# Altium PCB Bottom.PcbDoc
Units mm, origin at the board's own origin, x right, y up, seen from the top; angles counter-clockwise.
Board outline 40 x 40 mm, 2 copper layers (Top Layer, Bottom Layer); 16 components, 72 nets, 73 pads, 24 vias.
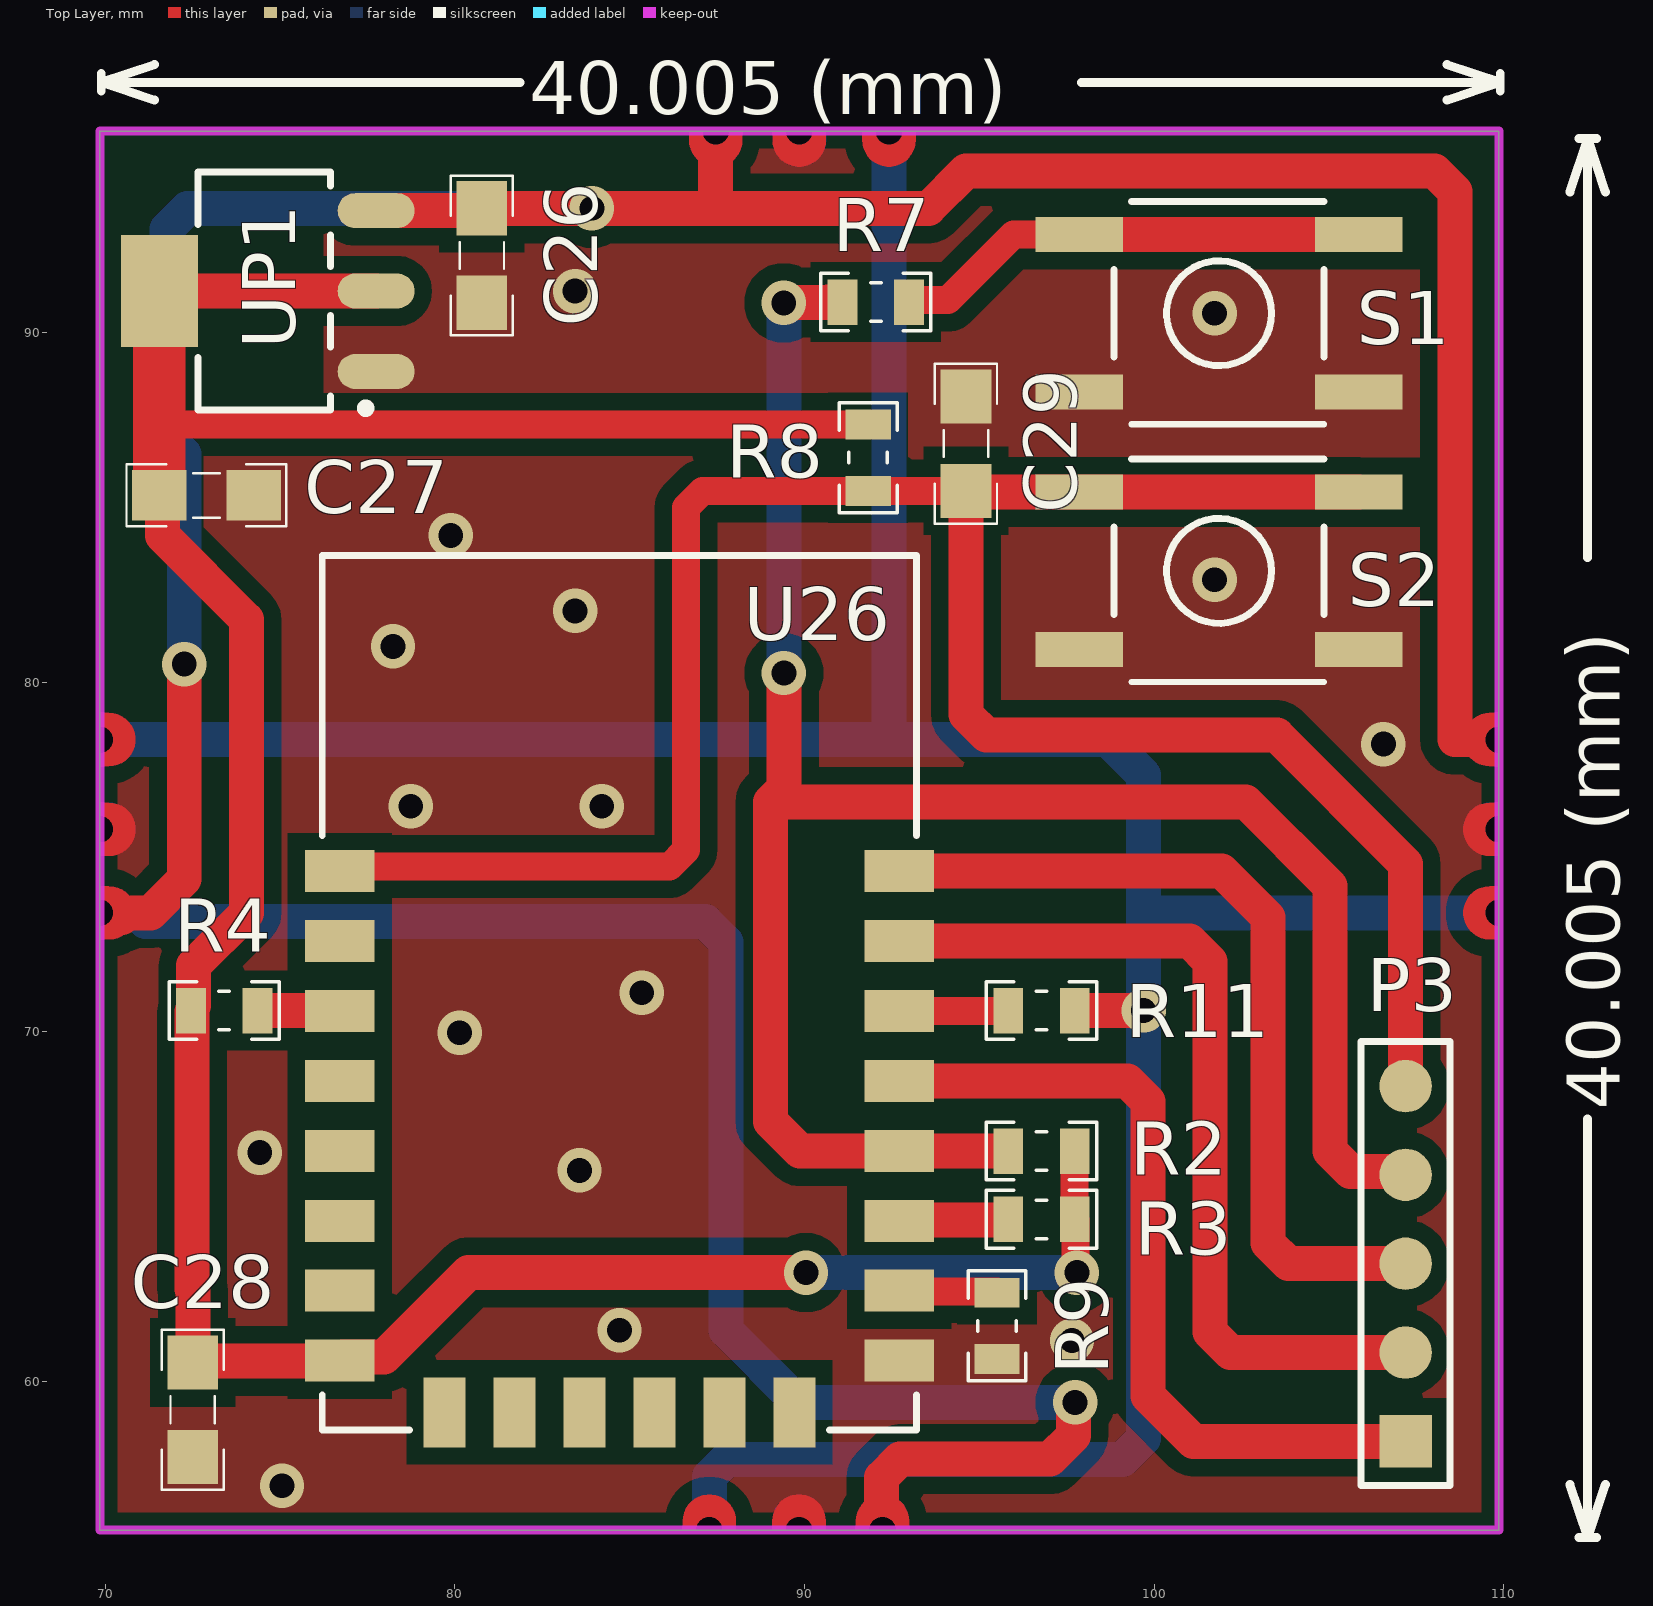
[diagram p0: Top Layer view]
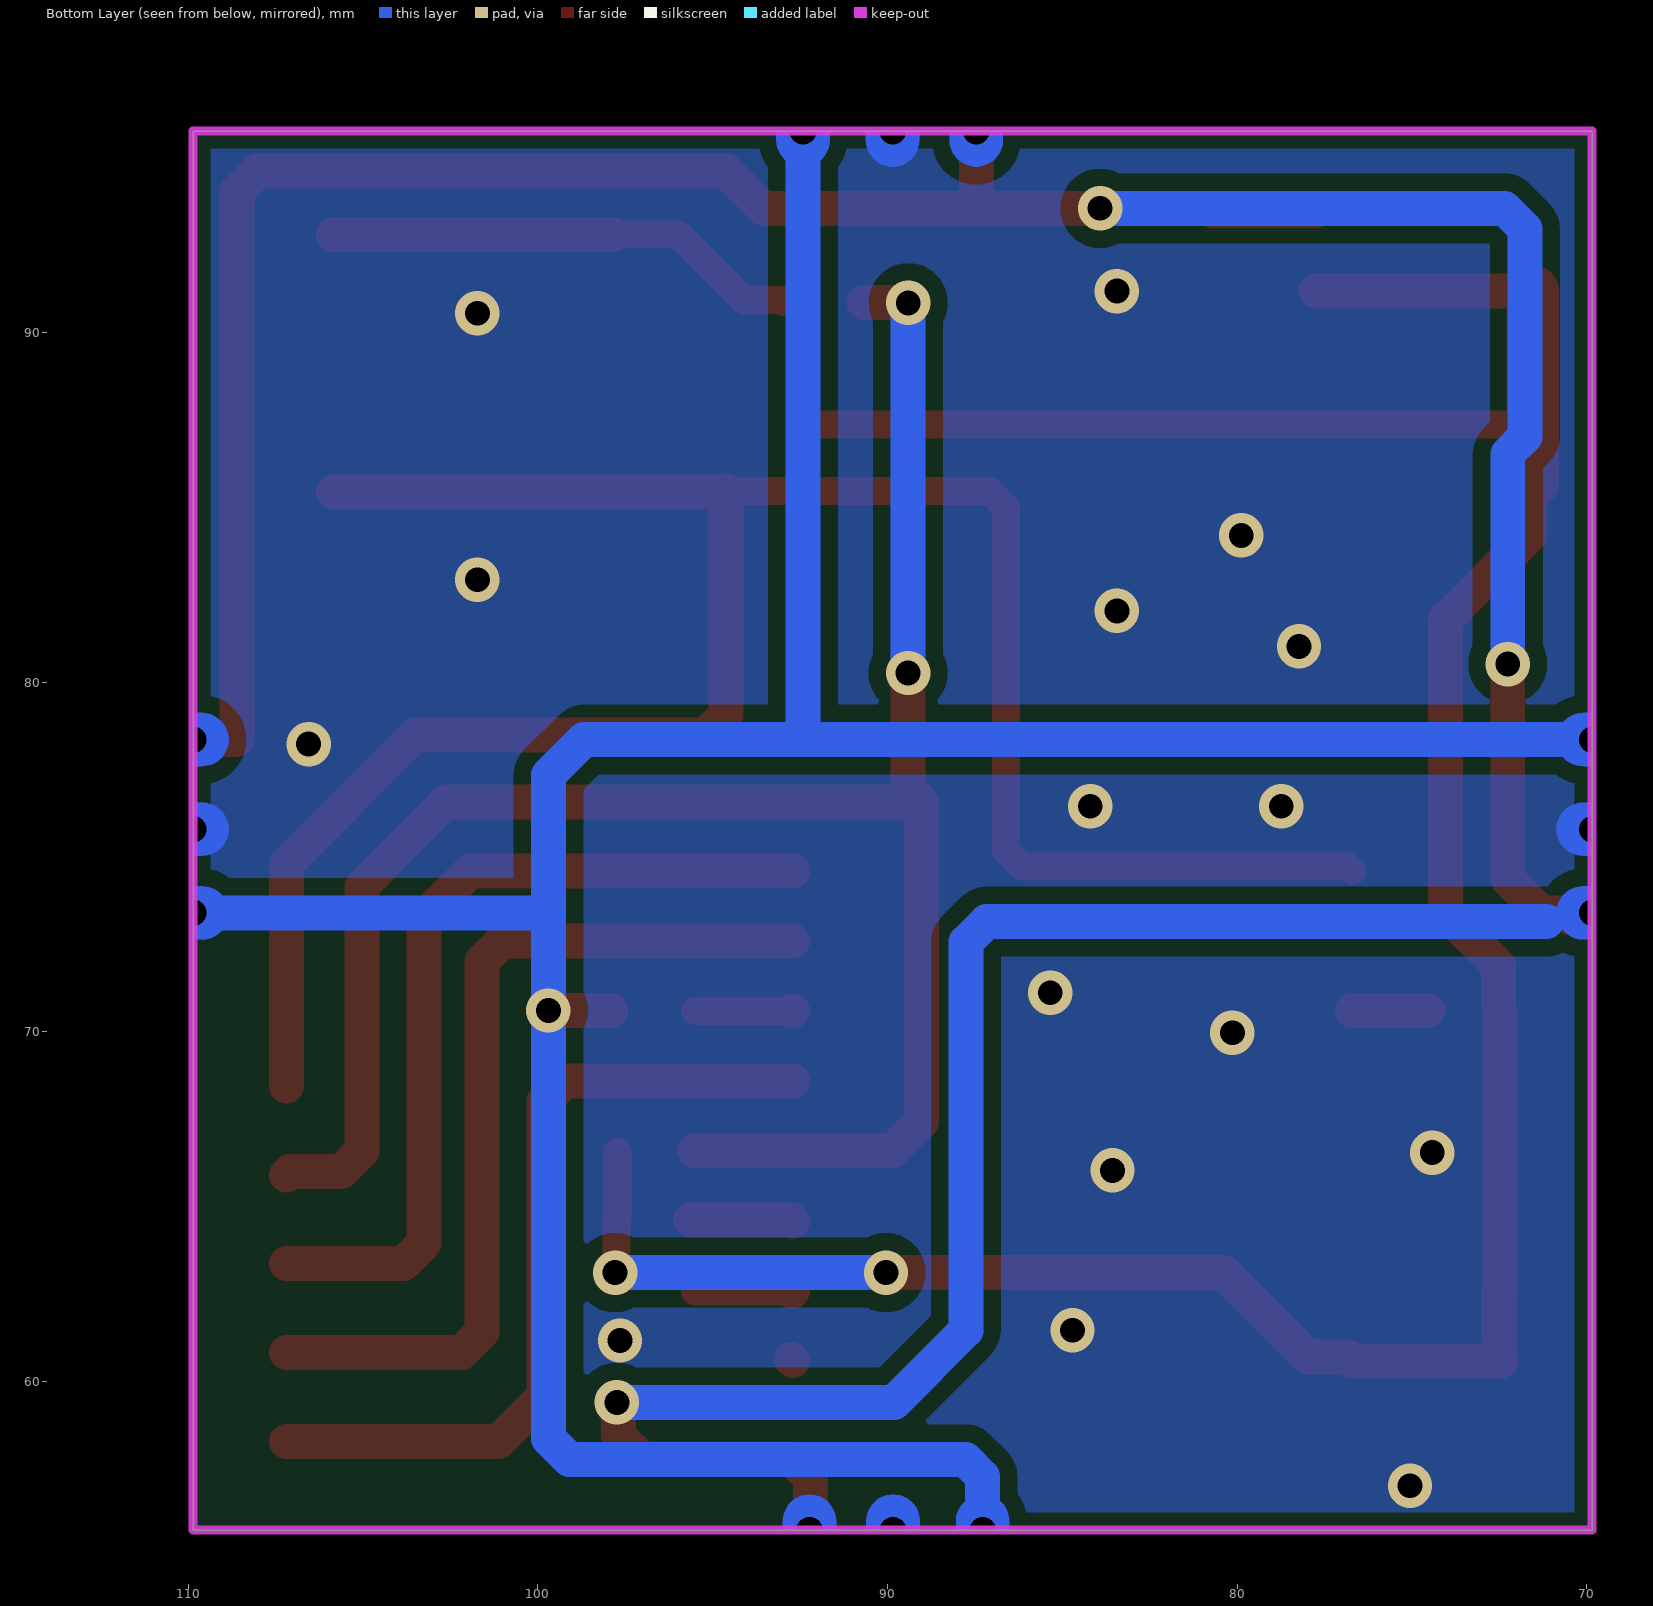
[diagram p1: Bottom Layer view, seen from below]
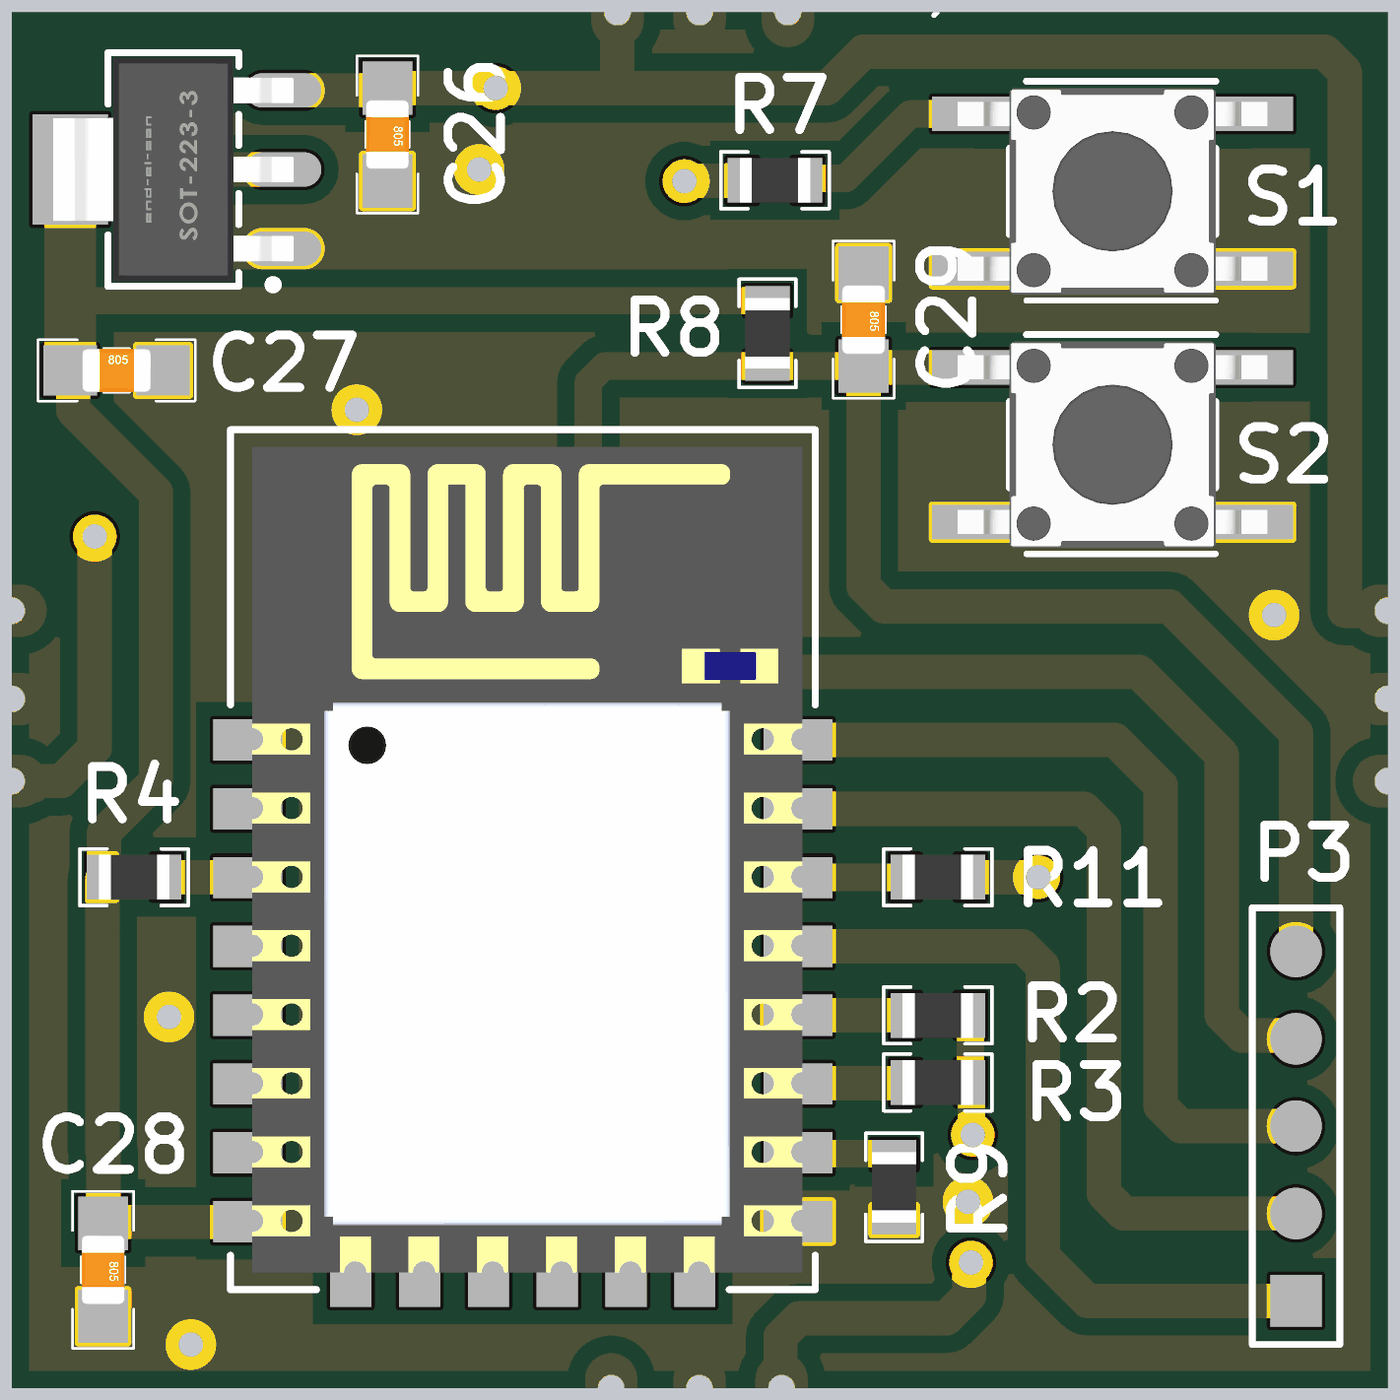
[diagram p2: 3D render of the assembled board from above, using the file's embedded part models]

## Layer stack, top to bottom
Top Solder: solder mask 0.0102, Solder Resist, Dk 3.5
Top Layer: signal copper 0.0356
Dielectric 1: dielectric 0.32, FR-4, Dk 4.8
Bottom Layer: signal copper 0.0356
Bottom Solder: solder mask 0.0102, Solder Resist, Dk 3.5

## Board outline
69.85,55.753 69.85,95.758 109.855,95.758 109.855,55.753

## Design rules (kind name [scope] priority, off if disabled: settings)
Clearance [All] p1: gap=0.5 ignorepadtopadclearanceinfootprint=FALSE
PolygonConnect [All] p1: connectstyle=Direct reliefconductorwidth=0.254 reliefentries=4 polygonreliefangle="90 Angle" airgapwidth=0.254
RoutingVias [All] p1: holewidth=0.711 width=1.27 viastyle="Through Hole" minholewidth=0.711 minwidth=1.27 maxholewidth=0.711 maxwidth=1.27
SolderMaskExpansion [All] p1: expansion=0.102 istentingtop=FALSE
Width [All] p1: maxlimit=2 minlimit=0.254 preferedwidth=1
30 further rules are at their usual default settings.

## Components (designator, comment, footprint, x,y, rotation, side; value= is the part's Value field where it differs from the comment)
C26 "1uF" CAPC3413X12N 80.772,92.202 r270 top
C27 "10uF" CAPC3413X12N 72.898,85.344 r0 top
C28 "0.1uF" CAPC3413X12N 72.505,59.196 r270 top
C29 "0.1uF" CAPC3413X12N 94.615,86.821 r270 top
P3 "To Button Board" HDR1X5 107.188,58.293 r90 top
R2 "12K" RES0805 96.776,66.594 r180 top
R3 "12K" RES0805 96.776,64.643 r180 top
R4 "12K" RES0805 73.406,70.612 r0 top
R7 "470" RES0805 92.039,90.871 r0 top
R8 "12K" RES0805 91.821,86.421 r270 top
R9 "12K" RES0805 95.504,61.595 r90 top
R11 "1K" RES0805 96.776,70.612 r0 top
S1 "Switch PB" SW-PB 101.854,90.551 r180 top
S2 "Switch PB" SW-PB 101.854,83.185 r180 top
U26 "ESP-12F" ESP-12F 84.709,71.12 r0 top
UP1 "3V3" SOT223 74.549,91.186 r180 top

## Footprints (in the part's own frame and the unit in brackets; to place one, negate y for a bottom-side part, rotate by r counter-clockwise, add the part's x,y. Pads: shape width x height; smd on the part's side, far side on the other; paste and mask are expansions set on the pad)
CAPC3413X12N [mm] "Chip Capacitor, 2-Leads, Body 3/40x1/30mm, IPC Medium Density-Design:Abbas Basereh"
  rect 1.55x1.45 smd: 1(-1.35,0) 2(1.35,0)
  silkscreen extent -2.29,-0.89 2.29,0.89, body extent -1,-0.62 1,0.63, height 0.78
ESP-12F [mm]
  rect 2x1.2 smd: 1(-8,3.48) 2(-8,1.48) 3(-8,-0.52) 4(-8,-2.52) 5(-8,-4.52) 6(-8,-6.52) 7(-8,-8.52) 8(-8,-10.52) 15(8,-10.52) 16(8,-8.52) 17(8,-6.52) 18(8,-4.52) 19(8,-2.52) 20(8,-0.52) 21(8,1.48) 22(8,3.48)
  rect 1.2x2 smd: 9(-5,-12) 10(-3,-12) 11(-1,-12) 12(1,-12) 13(3,-12) 14(5,-12)
  silkscreen extent -8.5,-12.5 8.5,12.5, body extent -7.87,-12 8.13,12, height 3
HDR1X5 [mm] "Connector; Header; 5 Position"
  rect 1.5x1.5 smd: 1(0,0)
  round 1.5 smd: 2(2.54,0) 3(5.08,0) 4(7.62,0) 5(10.16,0)
  silkscreen extent -1.27,-1.27 11.43,1.27
RES0805 [mm] "Chip Resistor, 2-Leads, Body 2/00x1/25mm, IPC Medium Density DESIGNER:ABBAS BASEREH"
  rect 0.85x1.3 smd: 1(-0.95,0) 2(0.95,0)
  silkscreen extent -1.58,-0.82 1.58,0.82, body extent -1.02,-0.65 1.02,0.65, height 0.5
SOT223 [mm] "SOT223, 4-Leads, Body 6.5x3.5mm, Pitch 2.30mm-Designer Abbas Basereh"
  oval 2.2x1 smd: 1(-3.2,2.3) 2(-3.2,0) 3(-3.2,-2.3)
  rect 2.2x3.2 smd: 4(3,0)
  Top Layer pour cut-out: -1.7,3.556 1.7,3.556 1.7,-3.556 -1.7,-3.556
  silkscreen extent -3.03,-3.4 1.9,3.47, body extent -3.5,-3.25 3.5,3.25, height 1.7
SW-PB [mm]
  rect 2.5x1 smd: 1(-3.992,2.25) 1(3.992,2.25) 2(-3.992,-2.25) 2(3.992,-2.25)
  silkscreen extent -3,-3.2 3,3.18, body extent -4.5,-3 4.5,3, height 5

## Part data
C26 C27 C28 C29: library part "CAP SMD 0805", "CAP 0805", Data=16-12-2016, Desc.="CAP SMD 0805", Designer="Abbas Basereh"
P3: library part "Header 5", "Header, 5-Pin", LatestRevisionDate=17-Jul-2002, LatestRevisionNote="Re-released for DXP Platform.", Publisher="Altium Limited"
R2 R3 R4 R7 R8 R9 R11: library part "RES SMD PACKAGE", "TOTAL SMD RESISTOR PACK", Data=2017-3-10, Desc.="RES SMD PAKAGES", Designer="Abbas Basereh"
S1 S2: "Push Button Switch"
U26: "WiFi Module", Package=Package, Availability="No availability data", Check_prices=https://www.snapeda.com/parts/ESP-12F/AI-Thinker/view-part/6648243/?ref=eda, MF=AI-Thinker, MP=ESP-12F, Price=None, SnapEDA_Link=https://www.snapeda.com/parts/ESP-12F/AI-Thinker/view-part/6648243/?ref=snap
UP1: library part AMS1117-x.x, "x.x Volt, 800mA Low-Dropout Linear Regulator, 4-pin SOT-223", Data=16-12-2016, Designer="Ali Hafizi"

## Free pads (board coordinates)
  round 0 hole 0.762: 4(69.85,73.406) 4(69.85,75.794) 4(69.85,78.359) 4(87.278,55.755) 4(87.462,95.758) 4(89.843,55.755) 4(89.85,95.758) 4(92.231,55.755) 4(92.415,95.758) 4(109.855,73.406) 4(109.855,75.794) 4(109.855,78.359)

## Via types
v1: diameter 1.27, hole 0.711, Top Layer to Bottom Layer, 24 vias

## Nets (pads, with @x,y where several pads share a name; then routed paths per layer and width w, separated by ;. In a path a pad name is that pad's centre, name@x,y a point inside that pad or via, vN(x,y) a via of type N, cw(c..) or ccw(c..) an arc to the next point about the centre after c; other vN are vias at no path point)
+3.3: C27.1 C28.1 R2.1 R3.1 R4.1 R8.1 U26.8 UP1.2 UP1.4 | length 88.1
  Top Layer w0.254: UP1.4 UP1.4
  Top Layer w0.8: 71.548,87.371 R8.1 ; R2.1@97.726,66.576 R3.1 97.751,64.618 97.751,63.158 v1(97.79,63.119)
  Top Layer w1: C27.1@71.548,85.725 71.637,85.636 71.637,84.192 74.041,81.788 74.041,73.406 72.531,71.896 R4.1@72.531,70.762 ; UP1.4 UP1.2 ; C28.1@72.456,60.59 72.511,60.645 72.511,62.605 72.517,62.611 72.486,62.642 R4.1@72.486,70.581 ; C28.1@72.771,60.579 72.782,60.59 76.699,60.59 76.809,60.7 77.972,60.7 80.391,63.119 v1(90.043,63.119)
  Top Layer w1.5: C27.1@71.548,85.725 71.548,87.371 UP1.4
  Bottom Layer w1: v1(90.043,63.119) v1(97.79,63.119)
+5: C26.1 pad.4@69.85,73.406 pad.4@87.462,95.758 pad.4@92.231,55.755 pad.4@109.855,78.359 UP1.3 | length 129.4
  Top Layer w0.254: C26.1@80.706,93.486 C26.1
  Top Layer w1: 70.485,73.279 70.612,73.406 71.296,73.406 72.263,74.373 v1(72.263,80.518) ; UP1.3 C26.1@80.706,93.486 ; C26.1 v1(83.92,93.552) 87.376,93.552 ; 87.458,95.101 87.458,93.634 87.376,93.552 ; 92.202,56.388 92.202,57.252 92.735,57.785 97.018,57.785 97.687,58.454 97.687,59.356 v1(97.738,59.408) ; 109.22,78.359 108.603,78.359 108.603,94.029 108.017,94.615 94.615,94.615 93.552,93.552 87.376,93.552
  Bottom Layer w1: 71.158,73.152 87.171,73.152 87.757,72.566 87.757,61.468 89.817,59.408 v1(97.738,59.408) ; v1(72.263,80.518) 72.263,86.533 71.771,87.025 71.771,92.966 72.357,93.552 v1(83.92,93.552)
Battery-: 
DN: 
DP: 
EN: R4.2 U26.3 | length 2.2
  Top Layer w1: R4.2@74.549,70.612 76.697,70.612 U26.3
GND: C26.2 C27.2 C28.2 C29.1 pad.4@69.85,75.794 pad.4@89.85,95.758 pad.4@89.843,55.755 pad.4@109.855,75.794 R9.1 S1.1 S2.1 U26.15 UP1.1 | length 0
  Top Layer w1: U26.15 U26.15@92.743,60.634
  other v1: 75.057,57.023 97.65,61.175 84.709,61.468 83.566,66.04 74.422,66.548 80.137,69.977 85.344,71.12 78.74,76.454 84.201,76.454 106.553,78.232 78.232,81.026 83.439,82.042 101.727,82.931 79.883,84.201 101.727,90.551 83.439,91.186
GPIO0: P3.4 R2.2 R7.1 U26.18 | length 58.7
  Top Layer w1: v1(89.406,90.847) 89.418,90.859 90.666,90.859 R7.1@90.678,90.871 ; v1(89.408,80.264) 89.408,76.962 89.027,76.581 ; U26.18 U26.18@92.712,66.597 ; R2.2@95.504,66.597 U26.18@92.712,66.597 ; P3.4 107.092,66.009 105.615,66.009 105.029,66.594 105.029,74.168 102.616,76.581 89.027,76.581 ; 89.027,76.581 89.027,67.437 89.867,66.597 U26.18@92.712,66.597
  Bottom Layer w1: v1(89.406,90.847) 89.407,90.846 v1(89.408,80.264) v1(89.408,80.264)
GPIO2: R3.2 U26.17 | length 2.9
  Top Layer w1: U26.17 92.731,64.622 95.61,64.622 R3.2@95.631,64.643
GPIO4: P3.1 U26.19 | length 23.7
  Top Layer w1: U26.19 99.236,68.6 99.822,68.014 99.822,59.592 101.121,58.293 P3.1
GPIO5: pad.4@69.85,78.359 pad.4@87.278,55.755 pad.4@92.415,95.758 pad.4@109.855,73.406 R11.2 | length 89.6
  Top Layer w1: R11.2@97.917,70.612 v1(99.695,70.612)
  Bottom Layer w1: 70.358,78.359 98.679,78.359 99.695,77.343 v1(99.695,70.612) 99.695,58.371 99.097,57.773 87.769,57.773 87.278,57.281 87.278,56.515 ; 92.415,78.74 92.415,95.123 ; 100.281,73.406 109.382,73.406
GPIO9: U26.11
GPIO10: U26.12
GPIO12: U26.6
GPIO13: U26.7
GPIO14: U26.5
GPIO15: R9.2 U26.16 | length 2.8
  Top Layer w0.8: U26.16@92.736,62.572 R9.2@95.504,62.572
  Top Layer w1: U26.16 U26.16@92.736,62.572
GPIO16: U26.4
NetC30_1: 
NetC33_2: 
NetC34_2: 
NetC35_1: 
NetC36_1: 
NetD2_1: 
NetD3_1: 
NetJ1_A5: 
NetJ1_B5: 
NetQ1_1: 
NetQ1_2: 
NetQ2_1: 
NetQ2_2: 
NetQ3_1: 
NetQ3_4: 
NetQ3_5: 
NetQ3_6: 
NetR6_1: 
NetR7_2: R7.2 S1.2 | length 13.7
  Top Layer w0.8: R7.2 92.989,90.903 93.014,90.928 94.103,90.928 95.976,92.801 S1.2@97.862,92.801
  Top Layer w1: S1.2@97.862,92.801 S1.2@105.846,92.801
NetR11_1: R11.1 U26.20 | length 2.8
  Top Layer w0.8: U26.20@92.712,70.604 R11.1@95.501,70.604
  Top Layer w1: U26.20 U26.20@92.712,70.604
NetR12_1: 
NetR16_1: 
NetR17_1: 
NetR19_2: 
NetU1_2: 
NetU2_2: 
NetU3_2: 
NetU4_2: 
NetU5_2: 
NetU6_2: 
NetU7_2: 
NetU8_2: 
NetU9_2: 
NetU10_2: 
NetU11_2: 
NetU12_2: 
NetU13_2: 
NetU14_2: 
NetU15_2: 
NetU16_2: 
NetU17_2: 
NetU18_2: 
NetU19_2: 
NetU20_2: 
NetU21_2: 
NetU22_2: 
NetU23_2: 
NetU24_2: 
nRST: C29.2 P3.5 R8.2 S2.2 U26.1 | length 66.3
  Top Layer w0.8: U26.1 76.844,74.735 86.145,74.735 86.614,75.203 86.614,85.002 87.083,85.471 R8.2 C29.2
  Top Layer w1: C29.2 94.615,79.072 95.201,78.486 103.505,78.486 107.188,74.803 P3.5 ; C29.2@94.742,85.435 97.862,85.435 S2.2@105.846,85.435
OUTPUT1: 
RXD: P3.2 U26.21 | length 25.6
  Top Layer w1: U26.21 101.014,72.6 101.6,72.014 101.6,61.419 102.186,60.833 P3.2
Touch: 
TXD: P3.3 U26.22 | length 24.6
  Top Layer w1: U26.22 101.93,74.6 103.251,73.279 103.251,63.959 103.837,63.373 P3.3
VBUS: 
pads on no net: U26.2 U26.9 U26.10 U26.13 U26.14

## Polygon pours and split planes (outlines as drawn)
GND on Bottom Layer "POL12" (solid, remove dead copper, pour order 1): 70.361,95.248 109.35,95.248 109.35,56.259 70.361,56.259
GND on Top Layer "POL12" (solid, remove dead copper, pour order 0): 70.358,95.25 109.347,95.25 109.347,56.261 70.358,56.261

## Keep-outs
Keep-Out Layer:
  the board outline again, w0.254

## Other copper
Top Layer:
  region net +5: 92.993,56.009 ccw(c92.231,56.009) 91.469,56.009 91.469,55.755 92.993,55.755
  region net GND: 90.605,56.009 ccw(c89.843,56.009) 89.081,56.009 89.081,55.755 90.605,55.755
  region net GPIO5: 88.04,56.009 ccw(c87.278,56.009) 86.516,56.009 86.516,55.755 88.04,55.755
  region net +5: 86.7,95.504 ccw(c87.462,95.504) 88.224,95.504 88.224,95.758 86.7,95.758
  region net +5: 109.601,79.121 ccw(c109.601,78.359) 109.601,77.597 109.855,77.597 109.855,79.121
  region net GPIO5: 70.104,77.597 ccw(c70.104,78.359) 70.104,79.121 69.85,79.121 69.85,77.597
  region net +5: 70.104,72.644 ccw(c70.104,73.406) 70.104,74.168 69.85,74.168 69.85,72.644
  region net GND: 70.104,75.032 ccw(c70.104,75.794) 70.104,76.556 69.85,76.556 69.85,75.032
  region net GPIO5: 109.601,74.168 ccw(c109.601,73.406) 109.601,72.644 109.855,72.644 109.855,74.168
  region net GND: 109.601,76.556 ccw(c109.601,75.794) 109.601,75.032 109.855,75.032 109.855,76.556
  region net GND: 89.088,95.504 ccw(c89.85,95.504) 90.612,95.504 90.612,95.758 89.088,95.758
  region net GPIO5: 91.653,95.504 ccw(c92.415,95.504) 93.177,95.504 93.177,95.758 91.653,95.758
Bottom Layer:
  region net GPIO5: 88.04,56.009 ccw(c87.278,56.009) 86.516,56.009 86.516,55.755 88.04,55.755
  region net GND: 90.602,56.011 ccw(c89.84,56.011) 89.078,56.011 89.078,55.757 90.602,55.757
  region net +5: 92.993,56.009 ccw(c92.231,56.009) 91.469,56.009 91.469,55.755 92.993,55.755
  region net +5: 109.601,79.121 ccw(c109.601,78.359) 109.601,77.597 109.855,77.597 109.855,79.121
  region net +5: 86.7,95.504 ccw(c87.462,95.504) 88.224,95.504 88.224,95.758 86.7,95.758
  region net GPIO5: 70.104,77.597 ccw(c70.104,78.359) 70.104,79.121 69.85,79.121 69.85,77.597
  region net +5: 70.104,72.644 ccw(c70.104,73.406) 70.104,74.168 69.85,74.168 69.85,72.644
  region net GND: 70.106,75.035 ccw(c70.106,75.797) 70.106,76.559 69.852,76.559 69.852,75.035
  region net GND: 109.599,76.559 ccw(c109.599,75.797) 109.599,75.035 109.853,75.035 109.853,76.559
  region net GPIO5: 109.601,74.168 ccw(c109.601,73.406) 109.601,72.644 109.855,72.644 109.855,74.168
  region net GPIO5: 91.653,95.504 ccw(c92.415,95.504) 93.177,95.504 93.177,95.758 91.653,95.758
  region net GND: 89.091,95.502 ccw(c89.853,95.502) 90.615,95.502 90.615,95.756 89.091,95.756

## Silkscreen, mask and mechanical layers (free items; w line width, h text height)
Top Overlay:
  lines w0.254: 69.891,96.901 69.891,97.409 ; 71.415,96.647 69.891,97.155 ; 71.415,97.663 69.891,97.155 ; 81.869,97.155 69.891,97.155 ; 97.917,97.155 109.896,97.155 ; 108.372,96.647 109.896,97.155 ; 108.372,97.663 109.896,97.155 ; 109.896,96.901 109.896,97.409 ; 111.887,57.064 112.395,55.54 ; 111.887,94.021 112.395,95.545 ; 112.141,55.54 112.649,55.54 ; 112.141,95.545 112.649,95.545 ; 112.395,67.518 112.395,55.54 ; 112.395,83.566 112.395,95.545 ; 112.903,57.064 112.395,55.54 ; 112.903,94.021 112.395,95.545
  text "40.005 (mm)" at 82.123,96.241 h1.52
  text "40.005 (mm)" at 113.309,67.772 h1.52 r90